# Altium PCB TTFT_3.0_tiny.PcbDoc
Units mil, origin at the board's own origin, x right, y up, seen from the top; angles counter-clockwise.
Board outline 1060.03 x 600.03 mil, 4 copper layers (Top Layer, Internal Plane 1, Internal Plane 2, Bottom Layer), stack 30.634 mil thick; 18 components, 20 nets, 126 pads, 29 vias.
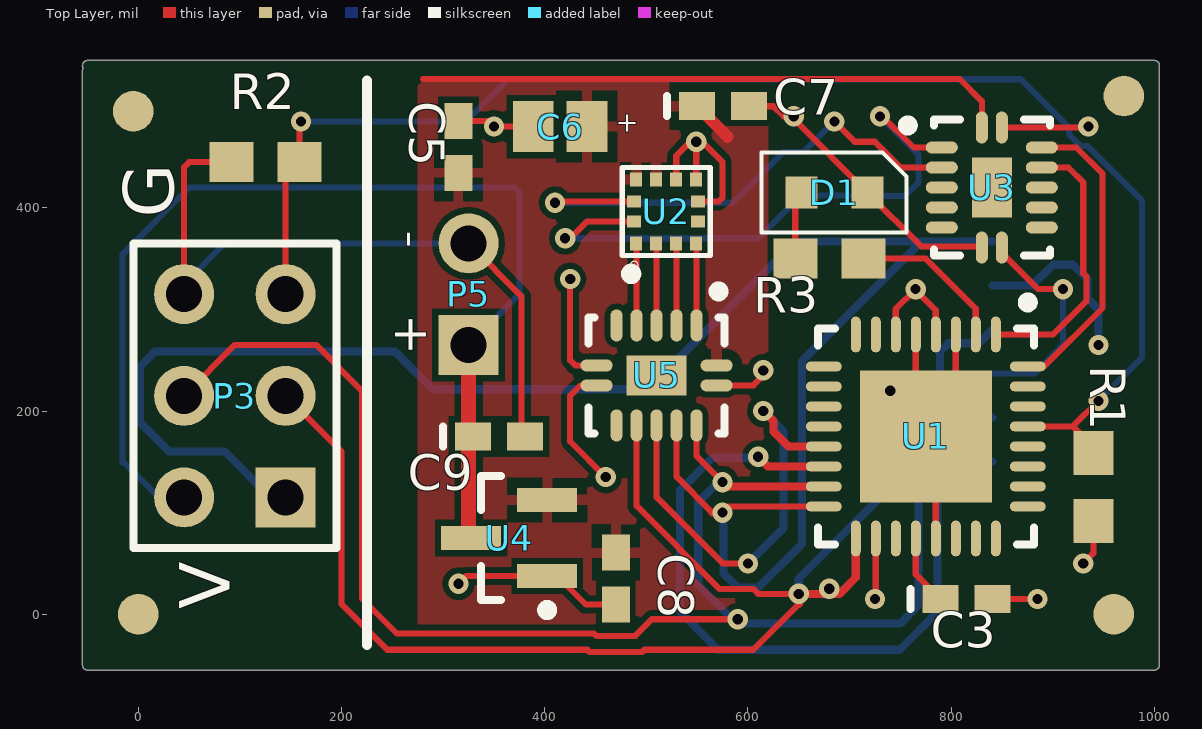
[diagram p0: Top Layer view]
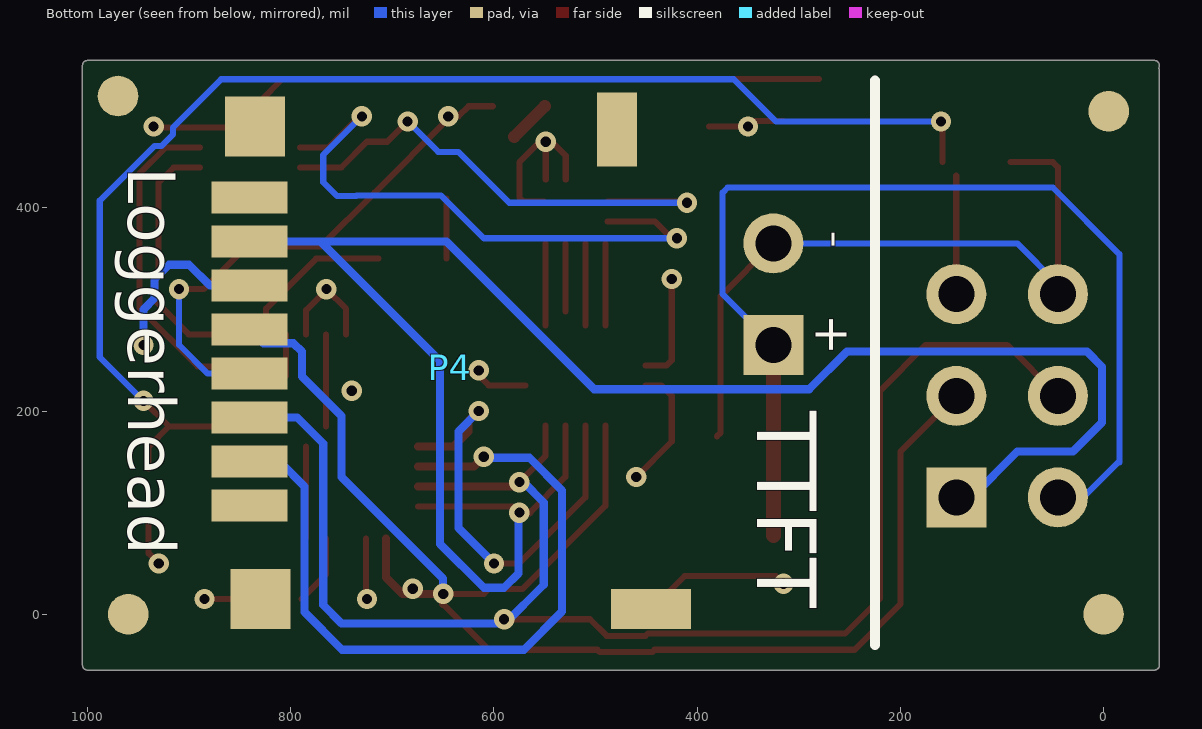
[diagram p1: Bottom Layer view, seen from below]
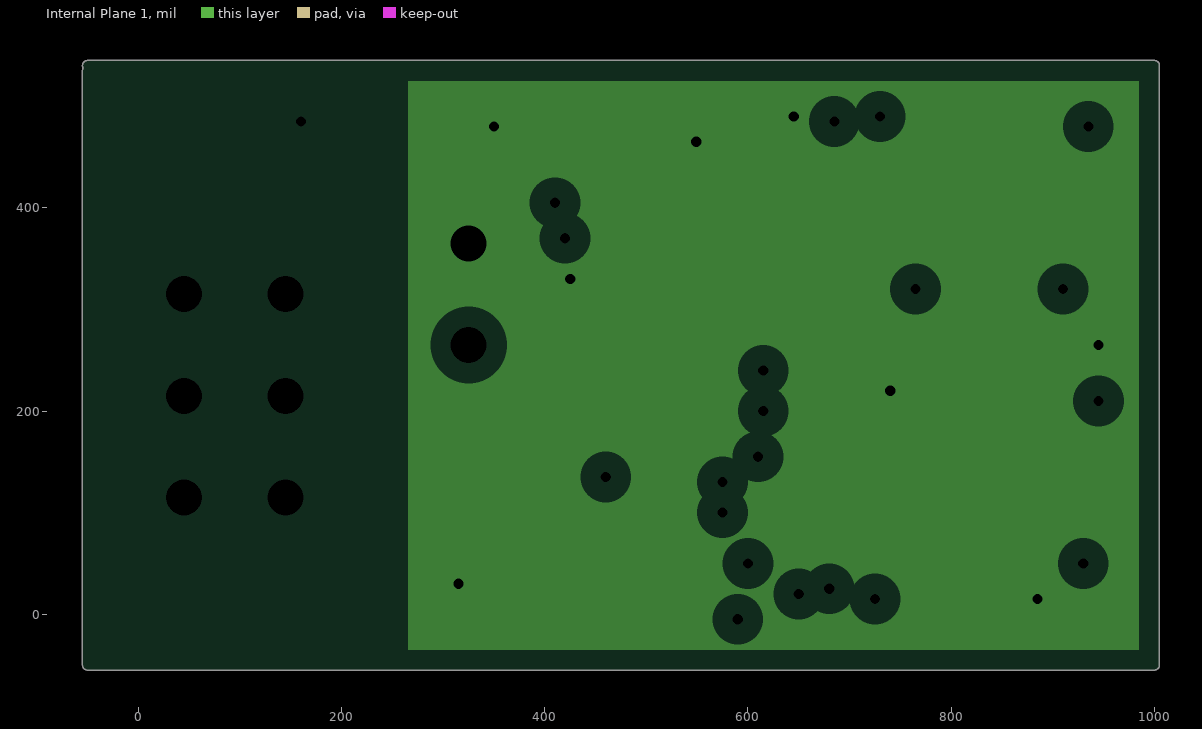
[diagram p2: Internal Plane 1, clearances drawn from the general rule]
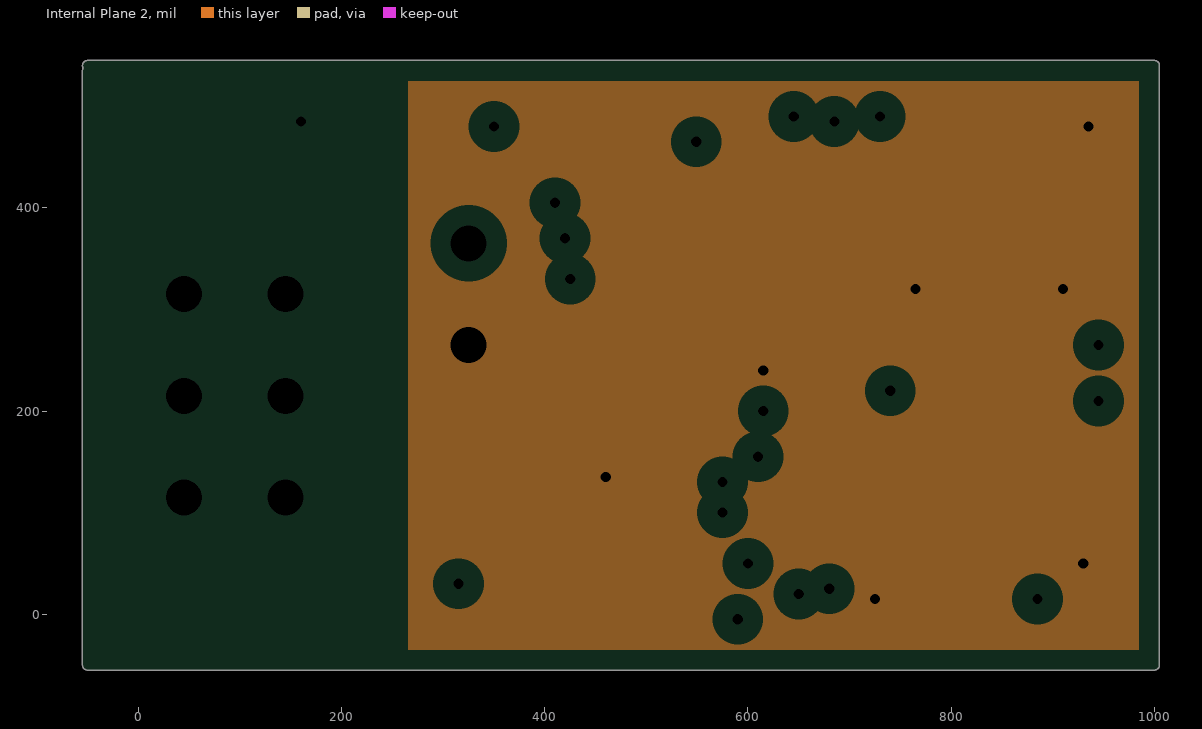
[diagram p3: Internal Plane 2, clearances drawn from the general rule]

## Layer stack, top to bottom
Top Solder: solder mask 0.4, Solder Resist, Dk 3.5
Top Layer: signal copper 1.4
Dielectric 1: core 10, FR-4, Dk 4.2
Internal Plane 1: plane copper 1.417, net GND
Dielectric 3: prepreg 5, Dk 4.2
Internal Plane 2: plane copper 1.417, net VCC
Dielectric 2: core 10, Dk 4.2
Bottom Layer: signal copper 1.4
Bottom Solder: solder mask 0.4, Solder Resist, Dk 3.5

## Board outline
-55.02,-50 -55.02,535 cw(c-50,535) -54.35,537.5 cw(c-50,540) -50,545.02 1000,545.02 cw(c1000,540) 1005.02,540 1005.02,-50 cw(c1000,-50) 1000,-55.02 -50,-55.02 cw(c-50,-50)

## Design rules (kind name [scope] priority, off if disabled: settings)
Clearance [All] p1: gap=6
PlaneClearance [All] p1: clearance=20
PlaneConnect [All] p1: planeconnectstyle=Relief reliefexpansion=20 reliefentries=4 reliefconductorwidth=10 reliefairgap=10
PolygonConnect [All] p1: connectstyle=Relief reliefconductorwidth=10 reliefentries=4 polygonreliefangle="90 Angle" airgapwidth=10
RoutingVias [All] p1: holewidth=10 width=20 viastyle="Through Hole" minholewidth=10 minwidth=10 maxholewidth=28 maxwidth=50
SolderMaskExpansion [All] p1: expansion=4
Width [All] p1: maxlimit=50 minlimit=6 preferedwidth=6
27 further rules are at their usual default settings.

## Components (designator, comment, footprint, x,y, rotation, side; value= is the part's Value field where it differs from the comment)
C3 "0.1uF" 0402 815,15 r0 top
C5 "100nF" 0402 315,460 r90 top
C6 "10uF" Tant0805 415,480 r0 top
C7 "100nF" 0402 575.59,500 r0 top
C8 "1.0uF" 0402 470,35 r270 top
C9 "1.0uF" 0402 355,175 r0 top
D1 "LED_0603" Diode0603 685,415 r0 top
P3 "AVR SPI" HDR2X3 145,115 r90 top
P4 "microSD Hirose" "DM3D microSD" 715,170 r180 bottom
P5 "Header 2" HDR1X2 325,265 r90 top
R1 "10k" 3-0603 940,125 r270 top
R2 "omit" 3-0603 125,445 r180 top
R3 "330" 3-0603 680,350 r180 top
U1 "ATmega8-16AC" 32M1-A_M 775,175 r270 top
U2 "LIS2DS12" LGA-12 490,365 r90 top
U3 "Level Shifter" DHVQFN14 840,420 r0 top
U4 "MCP1700T-1802E/TT" SOT-23-TT3_N 365,75 r180 top
U5 "Level Shifter" DHVQFN14 510,235 r270 top

## Footprints (in the part's own frame and the unit in brackets; to place one, negate y for a bottom-side part, rotate by r counter-clockwise, add the part's x,y. Pads: shape width x height; smd on the part's side, far side on the other; paste and mask are expansions set on the pad)
3-0603 [mm] "Chip Resistor; Body 1.6 x 0.9 mm (LxW typ)"
  rect 1.1x1 smd: 1(-0.85,0) 2(0.85,0)
32M1-A_M [mm] "QFN, 32-Leads, Body 5x5mm, Pitch 0.5mm, Thermal Pad 3.3x3.3mm, IPC Low Density"
  oval 0.9x0.25 smd: 1(-2.55,1.75) 2(-2.55,1.25) 3(-2.55,0.75) 4(-2.55,0.25) 5(-2.55,-0.25) 6(-2.55,-0.75) 7(-2.55,-1.25) 8(-2.55,-1.75) 17(2.55,-1.75) 18(2.55,-1.25) 19(2.55,-0.75) 20(2.55,-0.25) 21(2.55,0.25) 22(2.55,0.75) 23(2.55,1.25) 24(2.55,1.75)
  oval 0.25x0.9 smd: 9(-1.75,-2.55) 10(-1.25,-2.55) 11(-0.75,-2.55) 12(-0.25,-2.55) 13(0.25,-2.55) 14(0.75,-2.55) 15(1.25,-2.55) 16(1.75,-2.55) 25(1.75,2.55) 26(1.25,2.55) 27(0.75,2.55) 28(0.25,2.55) 29(-0.25,2.55) 30(-0.75,2.55) 31(-1.25,2.55) 32(-1.75,2.55)
  rect 3.3x3.3 smd paste-1.27: 33(0,0)
  silkscreen extent -3.47,-2.7 2.7,2.7, body extent -2.55,-2.55 2.55,2.55, height 1
0402 [mm] "Chip Capacitor; Body 1.0 x 0.5 mm (LxW typ)"
  rect 0.9x0.7 smd: 1(-0.65,0) 2(0.65,0)
  silkscreen extent -1.4,-0.25 -1.4,0.25
DHVQFN14 [mm] "QFN, 14-Leads, Body 2.50x3.00mm, Pitch 0.50mm, Thermal Pad 1.00x1.50mm, IPC Medium Density"
  oval 0.3x0.8 smd: 1(-0.25,1.5) 7(-0.25,-1.5) 8(0.25,-1.5) 14(0.25,1.5)
  oval 0.8x0.3 smd: 2(-1.25,1) 3(-1.25,0.5) 4(-1.25,0) 5(-1.25,-0.5) 6(-1.25,-1) 9(1.25,-1) 10(1.25,-0.5) 11(1.25,0) 12(1.25,0.5) 13(1.25,1)
  rect 1x1.5 smd: 15(0,0)
  silkscreen extent -2.22,-1.7 1.45,1.7, body extent -1.3,-1.55 1.3,1.55, height 1
Diode0603 [mm]
  rect 0.8x0.8 smd: A(-0.825,0) K(0.825,0)
  silkscreen extent -1.83,-1 1.8,1
"DM3D microSD" [mm] "MICROSD_HIROSE Push-Pull"
  rect 1.5x1.5 smd: 0(-3.048,7.874) 0(-2.921,-3.937)
  rect 1x1.85 smd: 0(6,7.8)
  rect 2x1 smd: 0(6.85,-4.191)
  rect 1.9x0.8 smd: 1(-3.188,-1.601) 2(-3.188,-0.501) 3(-3.188,0.599) 4(-3.188,1.699) 5(-3.188,2.799) 6(-3.188,3.899) 7(-3.188,4.999) 8(-3.188,6.099)
  body extent -3.65,-4.45 7.8,7.5, height 1.55
HDR1X2 [mm] "Connector; Header; 2 Position"
  rect 1.5x1.5 hole 0.9: 1(0,0)
  round 1.5 hole 0.9: 2(2.54,0)
HDR2X3 [mm] "Connector; Header; 3x2 Position"
  rect 1.5x1.5 hole 0.9: 1(0,0)
  round 1.5 hole 0.9: 2(0,2.54) 3(2.54,0) 4(2.54,2.54) 5(5.08,0) 6(5.08,2.54)
  silkscreen extent -1.27,-1.27 6.35,3.81
LGA-12 [mm] "LIS2DS12"
  rect 0.35x0.3 smd: 1(0,0) 2(0,-0.5) 3(0,-1) 4(0,-1.5) 7(1.6,-1.5) 8(1.6,-1) 9(1.6,-0.5) 10(1.6,0)
  rect 0.3x0.35 smd: 5(0.55,-1.55) 6(1.05,-1.55) 11(1.05,0.05) 12(0.55,0.05)
  silkscreen extent -0.65,-1.85 1.9,0.35
SOT-23-TT3_N [mm] "SOT23, 3-Leads, Body 2.9x1.3mm, Pitch 0.95mm, Lead Span 2.4mm, IPC Medium Density"
  rect 1.5x0.6 smd: 1(-0.95,0.95) 2(-0.95,-0.95) 3(0.95,0)
  silkscreen extent -1.07,-1.55 0.7,1.92, body extent -0.7,-1.52 0.7,1.53, height 1.12
Tant0805 [mil]
  rect 40x50 smd: 1(-26.5,0) 2(26.5,0)

## Part data
C3 C5 C7 C8 C9: library part C0402, "Ceramic Chip Capacitor - Standard"
C6: library part Tant0805
P3: library part "Header 3X2", "Header, 3-Pin, Dual row"
P5: "Header, 2-Pin"
R1 R2 R3: library part ERJ3RK, "Precision Thick Film Chip Resistor, 10 Ohm to 1M Ohm Range, 1% and 0.5% Tolerance, 0603 Size, 0.063 W"
U1: "8-Bit AVR Microcontroller with 8K Bytes of In-System Programmable Flash Memory"
U3 U5: library part NTB0104, "Voltage level translator"
U4: "Low Quiescent Current LDO, 3-Pin SOT-23, Extended Temperature, Tape and Reel"

## Free pads (board coordinates)
  round 40 smd paste-20 mask+5: 0(-5,495) 0(0,0) 0(960,0) 0(970,510)
  round 40 smd far side paste-20 mask+5: 0(-5,495) 0(0,0) 0(960,0) 0(970,510)

## Via types
v1: diameter 20, hole 10, Top Layer to Bottom Layer, 29 vias

## Nets (pads, with @x,y where several pads share a name; then routed paths per layer and width w, separated by ;. In a path a pad name is that pad's centre, name@x,y a point inside that pad or via, vN(x,y) a via of type N, cw(c..) or ccw(c..) an arc to the next point about the centre after c; other vN are vias at no path point)
CS: P4.2 U1.14 | length 750.9
  Top Layer w8: v1(610,155) 619.53,145.47 U1.14
  Bottom Layer w8: v1(610,155) 609,154 565.06,154 533,121.94 533,2.6 570.6,-35 749.4,-35 786.47,2.08 786.47,125.88 810.87,150.28 P4.2
CS_LIS: U1.13 U5.11 | length 440.4
  Top Layer w6: U5.11 510,115 575,50 v1(600,50)
  Top Layer w8: v1(615,200) 625,190 625,180 639.84,165.16 U1.13
  Bottom Layer w8: v1(600,50) 635,85 635,180 v1(615,200)
CS_LIS_1.8: U2.2 U5.4 | length 80.8
  Top Layer w6: U5.4 U2.2@510,365
DTR: P3.5 R1.1 R2.1 U1.29 | length 1398.3
  Top Layer w6: P3.5 R2.1@145,431.54 ; R2.1 v1@158.46,483.46 ; U1.29 919.84,184.84 ; R1.1@940,143.46 940,164.69 919.84,184.84 ; v1(945,210) 919.84,184.84
  Bottom Layer w6: v1(160,485) 322.47,485 363.98,526.5 868.5,526.5 916,479 916,472.13 927.13,461 934,461 988,407 988,253 v1(945,210)
GND: C3.2 C5.2 C6.1 C7.2 C8.2 C9.2 D1.K P3.6 P4.6 P5.2 R2.2 U1.3 U1.5 U1.21 U1.33 U2.6 U2.7 U2.8 U3.7 U4.1 U5.7 | length 1959.9
  Top Layer w6: P3.6 45,440 50,445 R2.2 ; v1(315,30) 322.6,37.6 U4.1 412.4,37.6 440.59,9.41 C8.2 ; C5.2 344.41,485.59 v1(350,480) C6.1 ; P5.2 377,313 377,178.59 C9.2 ; v1(425,330) 425,250 430.16,244.84 U5.7 ; U2.8 529.37,451.26 v1@549.06,470.94 ; U2.7 v1(549.06,465) v1@549.06,470.94 ; U2.6 571.34,406.34 575,410 575,445 v1@549.06,470.94 ; C7.2 625,500 v1@635,490 ; v1(645,490) 645,487.48 D1.K 770.48,362 829.1,362 U3.7 ; U1.33@765.16,184.84 U1.5 ; U1.21 U1.33@784.84,165.16 ; U1.33@804.53,234.53 U1.3 ; C3.2 v1(885,15)
  Bottom Layer w6: P3.6 45,325 85,365 P5.2
  Bottom Layer w8: P4.6 879.56,323.5 900.06,344 919.94,344 934,329.94 934,311 945,300 v1(945,265)
  other v1: 740,220
INT1: U1.32 U3.13 | length 300.1
  Top Layer w6: U1.32 891.52,243.9 949,301.37 949,433.63 923.26,459.37 U3.13
INT1_1.8: U2.12 U3.2 | length 599.3
  Top Layer w6: v1(420,370) 425,370 441.65,386.65 U2.12 ; v1@731.31,491.31 763.26,459.37 U3.2
  Bottom Layer w6: v1(420,370) 610,370 652,412 735.16,412 735.47,411.69 754.53,411.69 768,425.16 768,452 v1(730,490)
INT2: U1.1 U3.12 | length 267.7
  Top Layer w6: U1.1 900.39,275.39 933,308 933,332.53 930,335.53 930,425 915.31,439.69 U3.12
INT2_1.8: U2.11 U3.3 | length 510.7
  Top Layer w6: v1@410,406.34 U2.11 ; v1(685,485) 705,465 725,465 750.31,439.69 U3.3
  Bottom Layer w6: v1(410,405) 585,405 635,455 655,455 v1(685,485)
LED1: R3.1 U1.2 | length 156.5
  Top Layer w6: R3.1 775,350 824.21,300.79 U1.2
MISO: P3.1 P4.7 U1.16 U5.12 | length 1861.2
  Top Layer w6: U5.12 529.69,135.31 v1@565,100 ; v1@581.1,106.1 U1.16
  Top Layer w8: v1@565,100 v1(575,100)
  Bottom Layer w8: P3.1 130,115 85,160 30,160 1.47,188.53 1.47,243.53 16.47,258.53 252.62,258.53 289.67,221.47 501.47,221.47 646.81,366.81 770.75,366.81 ; v1(575,100) 576,99 576,40.06 590.06,26 609.94,26 653,69.06 653,249.06 770.75,366.81 ; P4.7 770.75,366.81
MISO_1.8: U2.3 U5.3 | length 67.1
  Top Layer w6: U5.3@529.69,297.94 U2.3@529.69,365
MOSI: P3.4 P4.3 U1.15 U5.13 | length 1574.2
  Top Layer w6: P3.4 95,265 175,265 220,220 220,15.46 254.46,-19 448.53,-19 450.84,-21.31 489.16,-21.31 505.47,-5 v1(590,-5) ; U5.13 549.37,155.63 v1(575,130)
  Top Layer w8: v1(575,130) 579.21,125.79 U1.15
  Bottom Layer w8: v1(575,130) 571.06,130 551,109.94 551,29 589,-9 749.94,-9 768,9.06 768,168 793.58,193.58 P4.3
MOSI_1.8: U2.4 U5.2 | length 80.8
  Top Layer w6: U5.2 U2.4@549.37,365
NetC3_1: C3.1 U1.20 | length 69.7
  Top Layer w6: U1.20 765.16,39.25 C3.1
NetD1_A: D1.A R3.2 | length 59
  Top Layer w6: R3.2 D1.A@646.54,409.02
SCK: P3.3 P4.5 U1.17 U5.10 | length 1459.5
  Top Layer w6: P3.3 200,160 200,10 245,-35 441.9,-35 444.21,-37.31 495.79,-37.31 498.1,-35 605,-35 650,10 ; U5.10 490.31,106.57 571.89,25 605,25 610,20 v1(650,20)
  Top Layer w8: 650,10 v1(650,20) 690,20 706.1,36.1 U1.17
  Bottom Layer w8: v1(650,20) 650,35 750,135 750,195 789.11,234.11 789.11,258.44 797.31,266.64 826.95,266.64 P4.5
  other v1: 680,25
SCK_1.8: U2.1 U5.5 | length 80.8
  Top Layer w6: U5.5 U2.1@490.31,365
V1.8: C5.1 C6.2 C7.1 C8.1 U2.9 U2.10 U3.1 U4.2 U5.1 | length 627.5
  Top Layer w6: 280,526.78 808.22,526.78 830.16,504.84 U3.1
  Top Layer w12: C7.1 580,470
VCC: C9.1 P3.2 P4.4 P5.1 R1.2 U1.4 U1.6 U1.18 U3.8 U3.14 U4.3 U5.8 U5.14 | length 1747.6
  Top Layer w6: U4.3@325,77.6 U4.3 ; U5.8 435.16,225.16 425,215 425,170 v1(460,135) ; U5.14 605.16,225.16 615,235 v1@615,245 ; v1@725.79,15 U1.18 ; U1.6 745.47,300.47 v1(765,320) 765,319 784.84,299.16 U1.4 ; U3.8@849.84,355.94 885.79,320 v1(910,320) ; U3.14 v1@929.06,479.06 ; v1(930,50) 940,60 R1.2
  Top Layer w15: U4.3@325,77.6 P5.1
  Bottom Layer w6: P3.2 20,115 -15,150 -15.53,149.47 -15.53,354.47 50,420 370,420 375,415 375,315 P5.1 ; P4.4 881.89,236.89 910,265 v1(910,320)
  other v1: 725,15 615,240 935,480
pads on no net: P4.0 P4.1 P4.8 U1.7 U1.8 U1.9 U1.10 U1.11 U1.12 U1.19 U1.22 U1.23 U1.24 U1.25 U1.26 U1.27 U1.28 U1.30 U1.31 U2.5 U3.4 U3.5 U3.6 U3.9 U3.10 U3.11 U3.15 U5.6 U5.9 U5.15

## Polygon pours and split planes (outlines as drawn)
V1.8 on Top Layer "V1.8" (solid, pour order 11): 275,520 280,525 620,525 620,-45 275,-45
VCC on Internal Plane 2 (split plane): 984.92,-34.92 265,-34.92 265,524.92 984.92,524.92
GND on Internal Plane 1 (split plane): 984.92,-34.92 265,-34.92 265,524.92 984.92,524.92

## Other copper
Internal Plane 1 (plane layer: these items are gaps in the copper):
  pour cut-out: -53.84,543.84 -52.68,545 265,545 265,-55 263.84,-53.84 -53.84,-53.84
Internal Plane 2 (plane layer: these items are gaps in the copper):
  pour cut-out: -53.84,543.84 263.84,543.84 265,545 265,-55.02 -52.66,-55.02 -53.84,-53.84

## Silkscreen, mask and mechanical layers (free items; w line width, h text height)
Top Overlay:
  circle w10: c485,335 r5
  lines w10: 225,-30 225,525
  text "-" at 290,360 h60 r90
  text "+" at 295,255 h60 r90
Bottom Overlay:
  lines w10: 225,-30 225,525
  text "Loggerhead" at 975,440 h80 r90
  text "-" at 290,360 h60 r90
  text "+" at 295,255 h60 r90
  text "TTFT" at 360,200 h100 r90
Mechanical 1:
  lines w10: -50,535 -50,-50 1000,-50 1000,540 -50,540

## Text inside footprints (layer, text, board x,y; h text height)
C6: Top Overlay "+" at 470,475 h19.68
P3: Top Overlay "G" at 35,390 h50 r90; Top Overlay "V" at 90,5 h50 r90